# Altium PCB XL991XT10W.PcbDoc (part 2 of 2)
Units mm, origin at the board's own origin, x right, y up, seen from the top; angles counter-clockwise.
Board outline 52.36 x 73.42 mm, 5 copper layers (Top Layer, Mid-Layer 2, Mid-Layer 6, Mid-Layer 13, Bottom Layer); 103 components, 66 nets, 312 pads, 177 vias.
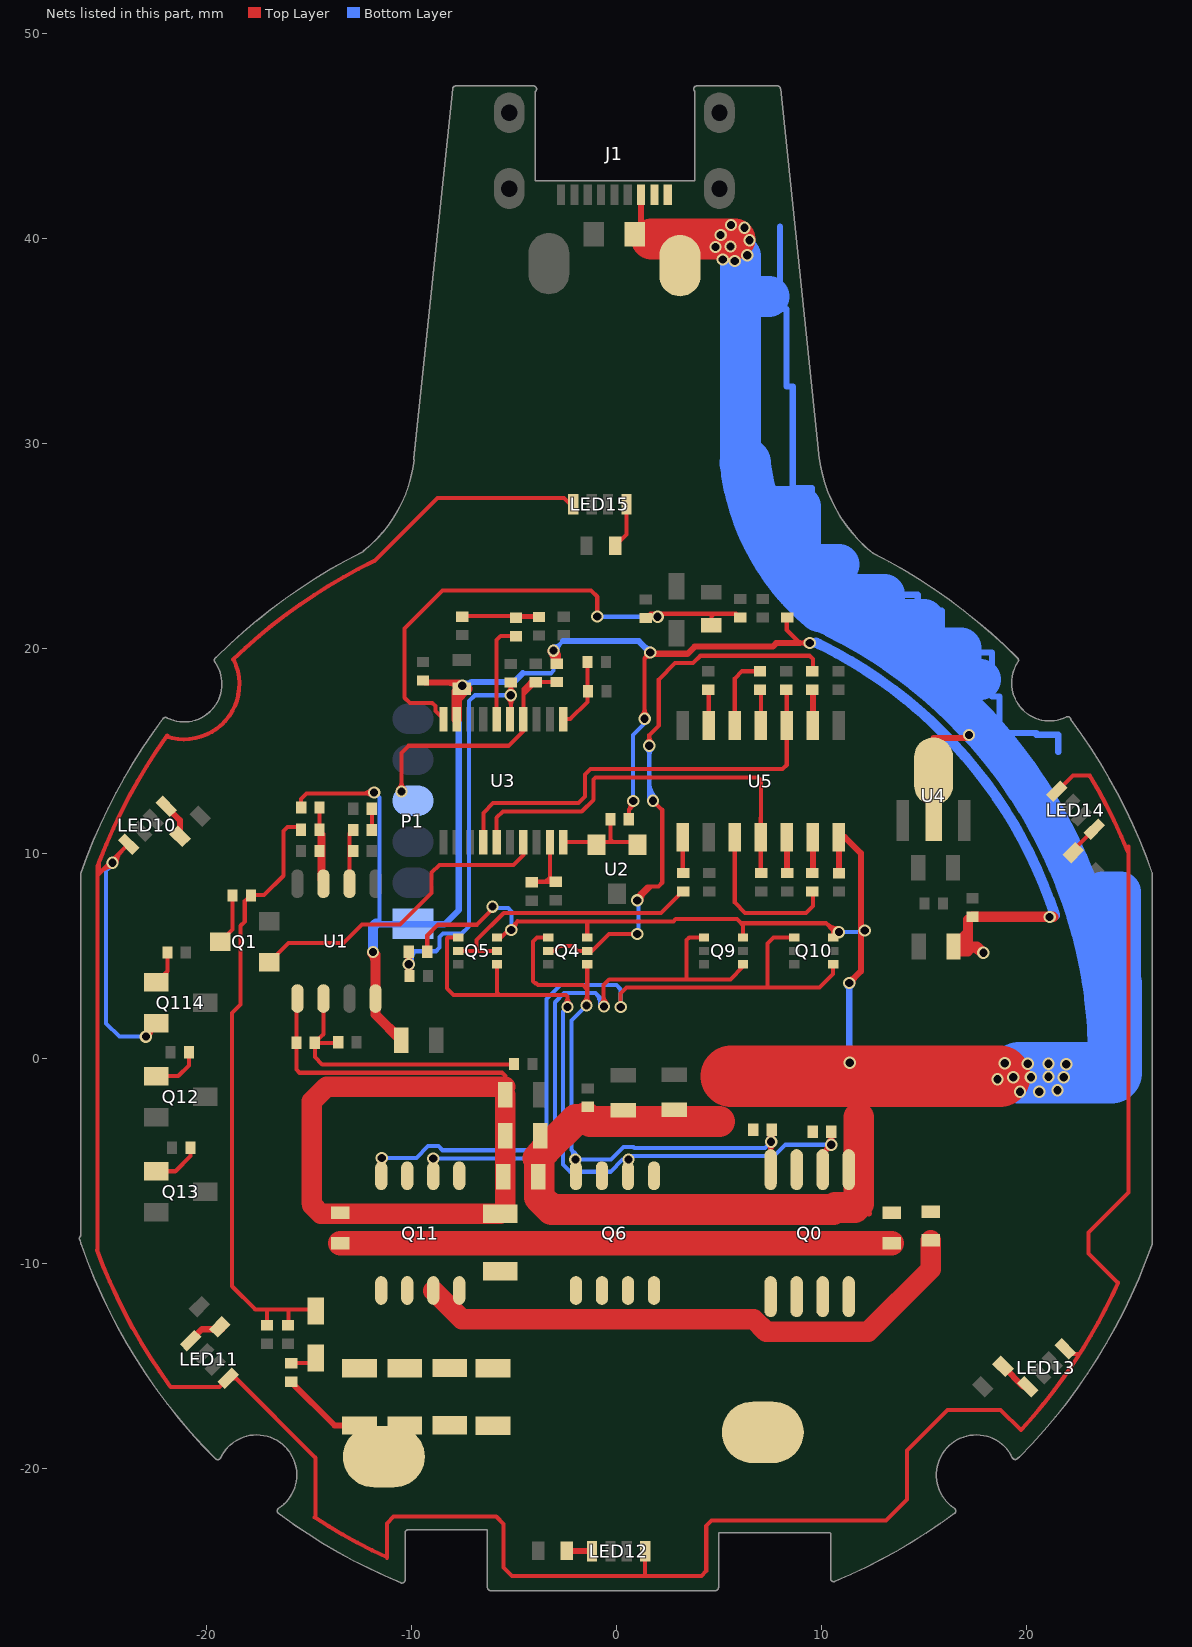
[diagram p3: the nets of this part, all layers, seen from the top]

## Via types
v1: diameter 0.6, hole 0.4, Top Layer to Bottom Layer, 177 vias

## Nets (pads, with @x,y where several pads share a name; then routed paths per layer and width w, separated by ;. In a path a pad name is that pad's centre, name@x,y a point inside that pad or via, vN(x,y) a via of type N, cw(c..) or ccw(c..) an arc to the next point about the centre after c; other vN are vias at no path point) (continued)
IN_VCC_AD: C0.2 R19.1 R25.2 U3.5 | length 24.8
  Top Layer w0.2: v1@-10.276,4.456 cw(c-10.623,4.109) R25.2@-10.132,4.109 ; v1@-10.276,4.739 ccw(c-10.623,5.085) R19.1@-10.132,5.085 ; R25.2@-10.132,4.12 cw(c-9.657,4.12) v1@-9.993,4.456 ; R19.1@-10.132,5.075 ccw(c-9.657,5.075) v1@-9.993,4.739 ; R19.1@-10.132,5.182 -10.132,4.081 R25.2@-10.102,4.05 ; v1@-5.298,17.581 cw(c-5.639,17.24) -5.156,17.24 cw(c-4.673,17.24) v1@-5.015,17.581 ; v1@-5.298,17.864 ccw(c-5.639,18.206) -5.156,18.206 ccw(c-4.673,18.206) v1@-5.015,17.864 ; U3.5@-5.197,16.558 -5.156,16.598 v1(-5.156,17.723) C0.2@-5.156,18.347
  Bottom Layer w0.2: v1@-10.227,4.775 ccw(c-10.307,4.928) -10.135,4.928 ; -10.047,5.016 ccw(c-9.77,4.739) v1(-10.135,4.597) -10.135,4.928 ; v1@-10.042,4.775 cw(c-9.962,4.928) -10.135,4.928 ; v1@-9.948,4.67 cw(c-9.458,4.86) -9.83,5.232 ; v1(-5.156,17.723) -6.909,17.723 -7.198,17.434 -7.198,6.451 -7.549,6.099 -8.469,6.099 -8.631,5.937 -8.631,5.413 -8.812,5.232 -9.83,5.232 ; -10.135,4.928 -9.83,5.232
NA_PWM: R31.1 U3.14 U5.3 | length 21.5
  Top Layer w0.2: U3.14@-6.497,10.558 -6.497,11.982 -6.021,12.458 -1.862,12.458 -1.53,12.789 -1.53,13.856 -1.27,14.116 8.103,14.116 8.306,14.32 U5.3@8.306,16.241 ; R31.1@8.306,17.996 U5.3@8.306,16.241 ; U5.3@8.311,16.246 U5.3@8.306,16.241
NB_PWM: R36.1 U3.15 U5.11 | length 22.5
  Top Layer w0.2: U3.15@-5.847,10.558 -5.847,11.748 -5.537,12.058 -1.696,12.058 -1.13,12.623 -1.13,13.613 -1.028,13.716 6.909,13.716 7.041,13.584 U5.11@7.041,10.796 ; 7.031,11.745 7.031,9.046 7.041,9.056 U5.11@7.041,10.509
NetC2_2: C2.2 R2.1 R3.1 U1.6 | length 14
  Top Layer w0.2: U1.6@-14.298,2.925 -14.298,1.185 C2.2@-14.718,0.766 ; R3.1@-13.585,0.766 C2.2@-14.718,0.766 ; R2.1@-5.002,-0.296 -13.395,-0.296 -14.358,-0.296 -14.718,0.064 C2.2@-14.718,0.766
NetC3_1: C3.1 C4.2 D1.2 R6.2 R15.1 | length 31
  Top Layer w0.2: -17.135,-12.246 -17.054,-12.327 C4.2@-17.054,-13.013 ; R6.2@-16.004,-13.012 -16.004,-12.284 -16.043,-12.246 ; C3.1@-15.388,11.158 C3.1@-15.392,11.154 -15.541,11.303 -16.053,11.303 -16.256,11.1 -16.256,8.916 -17.197,7.975 -17.838,7.975 -18.136,7.678 -18.136,6.68 -18.338,6.478 -18.338,2.642 -18.759,2.222 -18.759,-11.112 -17.625,-12.246 -16.043,-12.246 ; D1.2@-14.467,-12.246 -16.043,-12.246
NetC3_2: C3.2 R7.2 R10.1 U1.3 | length 6.5
  Top Layer w0.2: C3.2@-14.492,11.154 C3.2@-14.485,11.147 ; R7.2@-14.485,12.218 C3.2@-14.485,11.147 ; C3.2@-14.485,11.147 -14.298,10.96 U1.3@-14.298,8.525 -14.485,8.712 C3.2@-14.485,11.147
NetC5_2: C5.2 R8.1 U3.1 | length 3.5
  Top Layer w0.2: U3.1@-2.597,16.558 -2.257,16.558 -1.411,17.404 C5.2@-1.411,19.345
NetC6_2: C6.2 R9.1 | length 1
  Top Layer w0.2: C6.2@-11.942,12.179 -11.938,12.175 R9.1@-11.938,11.175
NetC7_1: C7.1 R13.1 U3.19 | length 3.2
  Top Layer w0.2: R13.1@-4.165,8.597 -4.136,8.626 -3.454,8.626 ; U3.19@-3.247,10.558 -3.247,9.904 -3.247,8.834 -3.454,8.626 ; C7.1@-2.968,8.626 -3.454,8.626
NetC20_2: C20.2 C22.1 C23.2 C24.2 C26.2 C27.2 Q0.C1 Q6.C1 Q11.C2 | length 26.9
  Top Layer w1.2: C26.2@-13.475,-9.021 C22.1@13.425,-9.021
NetD1_1: D1.1 R4.1 | length 1.3
  Top Layer w0.2: R4.1@-15.89,-14.866 -14.925,-14.866 D1.1@-14.671,-14.612
NetLED10_1: LED10.1 R41.2 | length 1.7
  Top Layer w0.3: LED10.1@-21.966,12.298 -21.298,11.63 -21.298,11.392 R41.2@-21.298,10.833
NetLED11_1: LED11.1 R42.2 | length 1.8
  Top Layer w0.3: LED11.1@-20.782,-13.762 -20.228,-13.208 -19.254,-13.208 R42.2@-19.215,-13.17
NetLED12_1: LED12.1 R43.2 | length 1.2
  Top Layer w0.3: R43.2@-2.424,-24.028 -1.224,-24.028 LED12.1@-1.198,-24.054
NetLED13_1: LED13.1 R44.2 | length 1.6
  Top Layer w0.3: R44.2@18.859,-15.024 19.846,-16.011 LED13.1@20.061,-16.011
NetLED14_1: LED14.1 R45.2 | length 1.6
  Top Layer w0.2: R45.2@22.289,10.045 22.289,10.163 LED14.1@23.322,11.197
NetLED15_1: LED15.1 R46.2 | length 2.3
  Top Layer w0.2: R46.2@-0.062,25.019 0.487,25.568 LED15.1@0.487,27.051
NetQ1_C: Q1.C R15.2 | length 2.5
  Top Layer w0.2: Q1.C@-19.336,5.701 -18.738,6.299 R15.2@-18.738,7.975
NetQ9_1: Q9.1 Q9.4 Q11.B1 | length 31
  Top Layer w0.2: v1@-9.081,-5.018 cw(c-9.422,-5.36) -8.94,-5.36 cw(c-8.457,-5.36) v1@-8.798,-5.018 ; Q11.B1@-8.94,-5.721 v1(-8.94,-4.877) ; v1@-0.751,2.681 ccw(c-1.031,2.962) -0.635,2.962 ; -0.635,3.084 ccw(c-0.065,3.084) v1@-0.468,2.681 ; v1(-0.61,2.54) -0.635,2.565 -0.635,3.581 -0.356,3.861 3.429,3.861 ; Q9.1@4.273,5.901 3.551,5.901 3.425,5.776 3.425,3.864 3.429,3.861 ; Q9.4@6.173,4.601 6.173,4.48 5.554,3.861 3.429,3.861
  Bottom Layer w0.2: v1(-8.94,-4.877) -3.235,-4.877 -3.007,-4.648 -3.007,2.744 -2.56,3.191 -1.021,3.191 ; v1@-0.808,2.566 ccw(c-1.549,2.662) -1.021,3.191 ; -0.733,2.903 cw(c-1.041,2.596) v1(-0.61,2.54) -0.61,2.78 -1.021,3.191
NetQ10_1: Q10.1 Q10.4 Q11.B2 | length 37.6
  Top Layer w0.2: v1@-11.597,-4.993 cw(c-11.88,-5.276) Q11.B2@-11.48,-5.276 ; Q11.B2@-11.48,-5.721 -11.48,-4.851 v1(-11.455,-4.851) ; Q11.B2@-11.48,-5.393 cw(c-10.914,-5.393) v1@-11.314,-4.993 ; v1(0.203,2.515) 0.203,3.175 0.489,3.461 7.366,3.461 ; Q10.1@8.673,5.901 7.656,5.901 7.366,5.611 7.366,3.461 ; Q10.4@10.573,4.601 10.573,4.122 9.912,3.461 7.366,3.461
  Bottom Layer w0.2: v1(-11.455,-4.851) -9.763,-4.851 -9.188,-4.277 -8.691,-4.277 -8.491,-4.477 -3.556,-4.477 -3.407,-4.328 -3.407,2.91 -2.726,3.591 -0.009,3.591 0.203,3.378 v1(0.203,2.515)
NetQ12_B: Q12.B R40.1 | length 2.5
  Top Layer w0.2: Q12.B@-22.46,-0.86 -21.383,-0.86 -20.861,-0.337 R40.1@-20.861,0.299
NetQ13_B: Q13.B R39.1 | length 2.4
  Top Layer w0.2: Q13.B@-22.46,-5.502 -21.53,-5.502 -20.784,-4.757 R39.1@-20.784,-4.324
NetQ114_B: Q114.B R38.1 | length 1.7
  Top Layer w0.2: Q114.B@-22.46,3.712 -21.913,4.259 R38.1@-21.913,5.151
NetR5_2: R5.2 U2.2 U2.3 U3.20 | length 4.9
  Top Layer w0.2: U3.20@-2.597,10.558 -0.333,10.558 ; R5.2@-0.298,11.703 -0.298,10.68 -0.254,10.636 -0.333,10.558 ; U2.2@1.025,10.439 0.907,10.558 -0.333,10.558
NetR9_2: R9.2 R11.2 U1.2 | length 2.7
  Top Layer w0.2: U1.2@-13.028,8.525 -13.028,10.985 R9.2@-12.838,11.175
NetR14_1: R14.1 R16.2 RTC1.2 | length 5
  Top Layer w0.2: RTC1.2@-7.493,21.593 -3.815,21.593 -3.76,21.537 -4.898,21.537 -4.927,21.508 R14.1@-4.944,21.526
NetR29_1: R29.1 U5.2 | length 1.7
  Top Layer w0.3: U5.2@9.581,16.246 R29.1@9.581,17.996
NetR30_1: R30.1 U5.4 | length 1.8
  Top Layer w0.2: R30.1@7.031,17.996 7.041,17.986 U5.4@7.041,16.246
NetR30_2: R30.2 U5.5 | length 3.7
  Top Layer w0.2: U5.5@5.771,16.246 5.771,18.541 6.127,18.896 R30.2@7.031,18.896
NetR32_1: R32.1 U5.6 | length 1.8
  Top Layer w0.2: U5.6@4.501,16.246 4.501,17.991 R32.1@4.506,17.996
NetR34_1: R34.1 U5.8 | length 1.7
  Top Layer w0.2: R34.1@3.231,9.046 U5.8@3.231,10.796
NetR35_1: R35.1 U5.10 | length 8.1
  Top Layer w0.2: U5.10@5.771,10.796 5.771,7.608 6.278,7.101 9.241,7.101 9.581,7.441 R35.1@9.581,8.146
NetR35_2: R35.2 U5.13 | length 1.7
  Top Layer w0.3: R35.2@9.581,9.046 U5.13@9.581,10.796
NetR37_1: R37.1 U5.12 | length 1.8
  Top Layer w0.3: R37.1@8.306,9.046 8.311,9.051 U5.12@8.311,10.796
NRST: C8.1 P1.4 R12.2 U3.4 | length 13.7
  Top Layer w0.2: v1@-10.632,13.165 ccw(c-10.973,13.507) -10.49,13.507 ccw(c-10.007,13.507) v1@-10.349,13.165 ; v1(-10.49,13.024) -10.49,14.907 -10.14,15.258 -5.273,15.258 -4.547,15.983 U3.4@-4.547,16.558 -4.547,17.755 ; C8.1@-3.941,18.361 -4.547,17.755 ; R12.2@-2.896,18.365 -4.215,18.365 -4.227,18.353 -4.547,18.033 -4.547,17.755
QC20: D2.1 R20.1 R21.2 U3.10 | length 25.5
  Top Layer w0.2: U3.10@-8.447,16.558 -8.839,16.95 -8.839,17.196 -8.992,17.348 -10.084,17.348 -10.338,17.602 -10.338,20.98 -8.482,22.837 -1.244,22.837 -0.94,22.532 v1(-0.94,21.565) ; R20.1@1.457,21.492 1.667,21.702 v1@2.007,21.702 ; v1(2.007,21.555) v1@2.007,21.702 ; D2.1@4.632,21.143 4.632,21.559 4.775,21.702 ; R21.2@6.007,21.523 5.828,21.702 4.775,21.702 ; v1@2.007,21.702 4.775,21.702
  Bottom Layer w0.2: v1(-0.94,21.565) -0.93,21.555 v1(2.007,21.555)
R: LED10.4 LED11.4 LED12.4 LED13.4 LED14.4 LED15.4 Q114.E | length 177.8
  Top Layer w0.2: -25.347,-9.337 ccw(c0.004,-0.047) -21.814,-15.952 -21.748,-16.018 -20.42,-16.018 ; -25.324,-9.286 -25.324,8.966 ; -25.324,9.398 -25.324,9.357 ; -25.145,9.119 cw(c-24.587,8.561) v1@-24.587,9.35 ; v1@-24.387,9.55 cw(c-23.598,9.55) -24.156,10.109 ; LED10.4@-23.805,10.46 -25.298,8.966 -25.324,8.966 ; v1(-22.962,1.067) -22.46,1.569 Q114.E@-22.46,1.712 ; Q114.E@-22.962,1.267 ccw(c-22.962,1.75) -22.62,1.408 ccw(c-22.279,1.067) v1@-22.762,1.067 ; -21.92,15.762 ccw(c0.004,0.003) -21.957,15.71 ; -19.856,-16.018 -20.42,-16.018 ; -18.704,19.471 cw(c0.004,0.003) -11.831,24.271 ; -18.664,19.429 cw(c-21.103,18.271) -21.957,15.71 ; -14.721,-22.389 ccw(c0.004,0.003) -11.203,-24.341 ; -14.681,-22.403 -14.681,-19.482 -18.563,-15.6 LED11.4@-18.944,-15.6 -19.361,-16.018 -20.42,-16.018 ; -11.811,24.282 -8.737,27.357 -2.563,27.357 -2.257,27.051 LED15.4@-2.113,27.051 ; -11.201,-24.359 -11.201,-22.682 -10.871,-22.352 -5.867,-22.352 -5.512,-22.708 -5.512,-24.841 -5.105,-25.248 1.397,-25.248 ; LED12.4@1.397,-24.255 1.397,-25.248 ; 19.733,-18.133 18.745,-17.145 16.154,-17.145 14.173,-19.126 14.173,-21.514 13.146,-22.541 4.641,-22.541 4.377,-22.805 4.377,-25.01 4.14,-25.248 1.397,-25.248 ; LED14.4@21.484,13.035 22.266,13.818 23.022,13.818 23.064,13.775 ; LED13.4@21.9,-14.172 22.147,-14.42 22.487,-14.42 ; 23.099,13.796 cw(c0.004,0.003) 24.953,10.062 ; 24.991,10.353 24.991,-6.53 23.038,-8.484 23.038,-9.516 24.443,-10.921 24.477,-10.921 cw(c0.004,0.003) 22.77,-14.137 ; -25.324,8.966 -25.324,9.051 ; -25.324,9.051 -25.324,9.357 ; -25.324,9.051 -25.263,9.112 -25.263,9.519 ; -25.324,9.357 cw(c0.004,0.003) -25.263,9.519 ; -25.263,9.519 cw(c0.004,0.003) -25.219,9.637 cw(c0.004,0.003) -21.957,15.71 ; 22.77,-14.137 cw(c0.004,0.003) 19.768,-18.097 ccw(c0.004,0.003) 22.77,-14.137
  Bottom Layer w0.2: -24.81,9.258 cw(c-24.587,9.035) v1@-24.587,9.35 ; v1@-24.785,9.519 cw(c-25.186,9.456) -24.899,9.169 ; v1(-24.587,9.55) -24.587,9.481 -24.899,9.169 ; v1(-22.962,1.067) -24.257,1.067 -24.899,1.709 -24.899,9.169
RUN_POWER: R14.2 U3.6 | length 4.9
  Top Layer w0.2: U3.6@-5.847,16.558 -5.847,20.41 -5.649,20.608 R14.2@-4.927,20.608
SIGN: C20.1 C23.1 C24.1 C27.1 pad.0@-11.351,-19.431 R4.2 | length 4.2
  Top Layer w0.3: R4.2@-15.89,-15.766 -13.749,-17.907 C20.1@-12.533,-17.907
SWITCH: Q1.B U3.17 | length 15.8
  Top Layer w0.2: Q1.B@-16.936,4.701 -16.936,4.705 -15.996,5.645 -13.31,5.645 -12.408,6.547 -10.555,6.547 -9.017,8.085 -9.017,9.068 -8.642,9.442 -5.029,9.442 -4.547,9.925 U3.17@-4.547,10.558
TX_GND: C2.1 C18.2 C19.2 C25.1 C26.1 Q11.E1 Q11.E2 R1.2 U1.5 | length 44.8
  Top Layer w0.2: U1.5@-15.568,2.925 -15.618,2.876 C2.1@-15.618,0.766 -15.621,0.762 -15.621,-0.533 -15.459,-0.696 -5.588,-0.696 -5.425,-0.859 R1.2@-5.425,-1.771
  Top Layer w1: R1.2@-5.436,-1.372 -14.148,-1.372 -14.859,-2.083 -14.859,-7.036 -14.834,-7.061 -14.834,-7.163 -14.426,-7.571 C25.1@-5.675,-7.571 -5.425,-7.321 C18.2@-5.425,-3.771 R1.2@-5.425,-1.771 R1.2@-5.432,-1.778
TX_VCC: C11.1 C12.1 C13.1 C18.1 C19.1 C21.2 C22.2 C28.2 C29.1 J1.1 pad.2@3.099,38.684 Q0.E1 Q0.E2 Q4.6 Q5.6 Q6.E1 Q6.E2 Q9.6 Q10.6 R19.2 R26.1 R27.2 U4.Vin U5.14 | length 231.9
  Top Layer w0.2: R19.2@-9.232,5.182 -9.232,6 -8.705,6.528 -6.807,6.528 -6.045,7.29 v1(-6.045,7.41) ; Q5.6@-5.827,5.901 -5.626,5.901 -4.838,6.69 ; v1@-4.937,6.319 cw(c-4.565,6.418) -4.838,6.69 ; -4.826,6.701 -4.838,6.69 ; Q4.6@-1.427,5.901 -1.427,6.68 ; Q9.6@6.173,5.901 6.173,6.501 6.073,6.601 ; 10.54,6.285 ccw(c10.829,6.574) v1(10.851,6.166) Q10.6@10.587,5.901 ; v1@10.655,6.127 cw(c10.41,6.078) Q10.6@10.587,5.901 ; Q10.6@10.812,5.97 ccw(c10.763,5.725) Q10.6@10.587,5.901 ; v1@10.84,6.365 cw(c10.796,7.174) 10.223,6.601 ; -4.838,6.69 1.511,6.69 2.778,6.69 2.889,6.801 5.873,6.801 6.073,6.601 ; 6.073,6.601 10.223,6.601 ; 10.223,6.601 10.573,6.251 Q10.6@10.573,5.901 Q10.6@10.587,5.901
  Top Layer w0.3: J1.1@1.198,42.145 1.198,40.589 1.524,40.589 ; 5.073,-0.349 5.588,-0.864 ; C28.2@10.852,9.042 U5.14@10.851,10.796 ; v1(11.354,3.683) 11.923,4.252 11.923,10.016 U5.14@11.144,10.795 ; v1@11.354,3.833 ccw(c11.354,4.195) 11.61,3.939 ccw(c11.866,3.683) v1@11.504,3.683 ; 11.825,-7.071 12.325,-7.571 ; U4.Vin@15.471,14.016 15.471,15.646 v1@17.196,15.646 ; U5.14@10.851,10.796 U5.14@11.144,10.795 ; U5.14@10.851,10.796 U5.14@10.851,10.796 11.143,10.796 U5.14@11.144,10.795
  Top Layer w1.5: -3.825,-4.871 -3.475,-4.471 -1.975,-2.971 ; -3.775,-4.971 -3.775,-6.771 -3.175,-7.371 10.578,-7.371 10.678,-7.271 11.625,-7.271 11.825,-7.071 11.825,-2.871 ; -1.475,-2.871 -1.275,-3.071 5.025,-3.071
  Top Layer w2: 1.702,39.98 5.791,39.98
  Top Layer w3: 5.588,-0.864 v1@18.694,-0.864
  Bottom Layer w0.2: v1@-6.198,7.334 -5.283,7.334 -5.131,7.182 v1(-5.131,6.267) ; v1(10.851,6.166) 12.04,6.166 v1(12.116,6.242)
  Bottom Layer w0.3: 7.971,40.589 7.971,36.576 8.288,36.576 8.288,32.791 8.604,32.791 8.604,27.824 9.54,27.824 9.54,25.578 ; v1@11.248,3.577 cw(c10.992,3.321) 11.354,3.321 cw(c11.716,3.321) v1@11.46,3.577 ; v1(11.354,3.683) 11.354,-0.178 v1(11.379,-0.203) ; 13.493,22.628 14.697,22.628 14.697,21.843 15.872,21.843 15.872,20.531 17.323,20.531 17.323,19.811 18.315,19.811 18.315,17.669 18.696,17.669 18.696,15.875 20.479,15.875 20.479,15.8 21.556,15.8 21.556,14.955 ; v1@20.979,-0.78 cw(c21.398,-1.223) 21.415,-0.613 ; v1@21.185,-0.998 cw(c22.103,-1.966) 22.139,-0.632 ; 21.285,-0.61 24.13,-0.686 21.59,-0.686 ; v1@21.318,-0.927 cw(c21.461,-1.196) v1@21.701,-1.007 ; v1@21.703,-0.819 cw(c22.081,-1.13) 22.034,-0.643 ; v1@21.84,-0.385 ccw(c22.565,0.34) 22.565,-0.686 ; v1@21.925,-1.02 cw(c22.733,-1.828) 22.733,-0.686 ; v1@22.052,-0.173 ccw(c23.289,1.064) 23.289,-0.686 ; v1@20.973,-0.357 ccw(c21.578,0.216) 21.555,-0.617 cw(c21.578,0.216) v1@20.973,-0.357 ; v1@21.191,-0.151 ccw(c22.321,0.92) 22.279,-0.636 cw(c22.321,0.92) v1@21.191,-0.151 ; 21.488,-0.615 cw(c21.471,-1.244) 21.927,-0.811 ccw(c21.471,-1.244) 21.488,-0.615 ; v1@21.837,-0.383 ccw(c22.436,0.185) 22.414,-0.64 cw(c22.436,0.185) v1@21.837,-0.383 ; v1@22.054,-0.176 ccw(c23.179,0.89) 23.138,-0.659 cw(c23.179,0.89) v1@22.054,-0.176
  Bottom Layer w2: 6.045,28.908 6.045,39.167 ; 6.489,37.181 7.438,37.181 ; 7.438,26.922 8.973,26.922 8.973,24.098 10.86,24.098 ; 9.887,21.874 cw(c0.004,0.003) 24,0.478 ; 10.86,22.65 13.079,22.65 13.079,21.424 15.003,21.424 15.003,20.035 16.813,20.035 16.813,18.494 17.765,18.494 ; 21.59,-0.686 24.651,-0.686 24.651,3.683 24.587,3.683 24.587,8.128 23.749,8.128
  Bottom Layer w2.5: 6.281,29.059 ccw(c17.015,30.253) 10.017,22.027
  Bottom Layer w3: 19.66,-0.686 24.13,-0.686
  other v1: 19.685,-1.626 20.625,-1.626 21.514,-1.549 18.593,-1.016 19.355,-0.914 20.218,-0.914 21.819,-0.914 21.082,-0.889 21.946,-0.279 20.066,-0.254 21.082,-0.254 18.948,-0.229 17.196,15.788 5.771,38.913 5.182,38.989 6.375,39.192 4.826,39.599 5.563,39.624 6.489,39.929 5.08,40.183 6.248,40.538 5.588,40.665
UA: Q0.B2 Q4.1 Q4.4 Q6.B2 R26.2 | length 30.4
  Top Layer w0.2: Q4.1@-3.327,5.901 -3.878,5.901 -4.064,5.715 -4.064,3.767 -3.955,3.658 -3.955,3.669 -3.941,3.683 -3.839,3.581 -1.633,3.581 -1.427,3.375 ; v1@-1.603,2.732 ccw(c-2.03,3.159) -1.427,3.159 ; v1(-1.462,2.591) -1.427,2.626 -1.427,3.375 ; -1.427,2.989 ccw(c-1.064,2.989) v1@-1.321,2.732 ; Q4.4@-1.427,4.601 -1.427,3.375 ; v1@7.402,-4.205 cw(c7.117,-4.49) Q0.B2@7.52,-4.49 ; v1@7.402,-3.923 ccw(c7.117,-3.638) R26.2@7.52,-3.638 ; Q0.B2@7.52,-5.421 7.52,-3.496 R26.2@7.575,-3.496 ; Q0.B2@7.52,-4.603 cw(c8.083,-4.603) v1@7.685,-4.205 ; R26.2@7.52,-3.525 ccw(c8.083,-3.525) v1@7.685,-3.923
  Bottom Layer w0.2: v1@-2.166,-4.807 ccw(c-2.377,-4.649) -2.191,-4.462 ; -2.028,-4.625 cw(c-2.191,-4.789) v1(-2.007,-4.928) ; v1(-1.462,2.591) -2.191,1.862 -2.191,-4.462 ; v1(7.544,-4.064) 7.244,-4.364 0.869,-4.364 0.833,-4.328 0.336,-4.328 -0.264,-4.928 v1(-2.007,-4.928) ; -2.191,-4.462 -2.007,-4.646 v1(-2.007,-4.928)
UAB: Q0.B1 Q5.1 Q5.4 Q6.B1 R27.1 | length 37
  Top Layer w0.2: Q5.1@-7.727,5.901 -8.233,5.901 -8.277,5.857 -8.277,3.425 -7.95,3.099 -5.701,3.099 ; Q5.4@-5.827,4.601 -5.827,3.225 -5.701,3.099 ; v1@-2.529,2.656 ccw(c-2.87,2.997) -2.388,2.997 ccw(c-1.905,2.997) v1@-2.246,2.656 ; v1(-2.388,2.515) -2.388,3.023 -2.464,3.099 -5.701,3.099 ; Q0.B1@10.06,-5.421 10.06,-4.621 v1(10.475,-4.206) R27.1@10.475,-3.546 ; v1@10.275,-4.206 cw(c9.793,-4.206) 10.134,-4.547 cw(c10.475,-4.889) v1@10.475,-4.406 ; v1@10.334,-4.064 ccw(c9.993,-3.723) 10.475,-3.723 ccw(c10.958,-3.723) v1@10.617,-4.064
  Bottom Layer w0.2: v1(-2.388,2.515) -2.607,2.296 -2.607,-5.176 -2.255,-5.528 -0.299,-5.528 0.301,-4.928 v1(0.584,-4.928) 0.748,-4.764 7.693,-4.764 8.251,-4.206 v1(10.475,-4.206)
UP-A: Q4.2 Q4.5 R29.2 | length 34.6
  Top Layer w0.2: Q4.2@-3.327,5.251 -3.028,5.251 -2.8,5.48 -2.124,5.48 -1.896,5.251 Q4.5@-1.427,5.251 -1.194,5.251 -0.37,6.075 v1(1.016,6.075) ; 1.159,8.061 ccw(c1.503,7.717) v1(1.016,7.715) ; v1@1.216,7.716 cw(c2.181,7.719) 1.499,8.401 ; 1.331,8.046 cw(c1.016,8.361) 1.016,7.915 ccw(c1.016,8.398) 1.357,8.057 ccw(c1.699,7.715) 1.216,7.715 cw(c1.736,7.715) 1.368,8.083 ; v1@1.459,15.4 ccw(c1.117,15.742) 1.6,15.742 ccw(c2.083,15.742) v1@1.742,15.4 ; v1(1.6,15.259) 1.6,15.778 2.064,16.241 2.064,18.498 2.862,19.296 3.734,19.296 4.089,19.651 9.425,19.651 9.581,19.495 R29.2@9.581,18.896 ; v1(1.778,12.576) 1.79,12.576 2.231,12.135 2.231,8.575 2.057,8.401 1.702,8.401 v1(1.016,7.715) ; v1(1.016,7.715) v1@1.016,7.731 ; v1@1.016,7.731 1.016,7.918 1.499,8.401 ; v1@1.016,7.731 1.686,8.401 1.499,8.401
  Bottom Layer w0.2: v1(1.016,7.715) 1.073,7.658 v1@1.073,6.075 ; v1@1.459,15.118 cw(c1.117,14.776) 1.6,14.776 cw(c2.083,14.776) v1@1.742,15.118 ; v1@1.6,12.576 v1(1.6,15.259) ; 1.6,13.005 ccw(c2.207,13.005) v1(1.778,12.576) ; 1.6,13.488 ccw(c2.69,13.488) v1@1.919,12.717
UP-B: Q5.2 Q5.5 R34.2 | length 13.5
  Top Layer w0.2: Q5.2@-7.727,5.251 -6.827,5.251 ; Q5.5@-5.827,5.251 -6.827,5.251 ; R34.2@3.23,8.146 2.174,7.09 1.676,7.09 1.665,7.101 -5.501,7.101 -6.827,5.776 -6.827,5.251
VCC: C1.2 C10.2 C15.2 C17.2 P1.1 R5.1 R7.1 R12.1 R22.2 R50.2 U1.8 U3.9 | length 107.6
  Top Layer w0.2: R7.1@-15.385,12.218 -15.385,12.669 -15.126,12.929 -11.877,12.929 v1(-11.826,12.979) ; -12.431,12.929 ccw(c-12.431,13.584) v1@-11.968,13.121 ; -12.187,12.929 cw(c-12.187,12.619) v1@-11.968,12.838 ; v1(-3.072,19.901) -3.072,19.724 v1@-3.027,19.679 ; R5.1@0.602,11.703 0.602,12.128 ; v1@0.642,12.462 cw(c0.41,12.32) 0.602,12.128 ; v1(0.813,12.567) 0.838,12.541 0.838,12.363 0.602,12.128 ; v1@1.23,16.721 ccw(c0.889,17.063) 1.372,17.063 ccw(c1.854,17.063) v1@1.513,16.721 ; v1(1.372,16.58) 1.372,19.526 ; v1@1.453,19.775 cw(c1.166,19.731) 1.372,19.526 ; v1@1.621,19.608 ccw(c1.577,19.321) 1.372,19.526 ; v1(1.651,19.806) 1.372,19.526 ; R22.2@8.307,21.523 8.307,20.903 8.941,20.269 v1(9.425,20.269) ; v1@9.284,20.128 ccw(c8.942,19.786) 8.942,20.269 ccw(c8.942,20.752) v1@9.284,20.411 ; C15.2@16.446,5.462 16.457,5.452 16.631,5.278 C15.2@16.631,5.216
  Top Layer w0.3: C10.2@-9.445,18.445 -9.339,18.339 -7.677,18.339 v1(-7.522,18.184) ; -8.258,18.339 cw(c-8.258,17.448) C1.2@-7.629,18.078 ; v1(1.651,19.806) 1.704,19.752 3.472,19.752 3.821,20.101 7.63,20.101 7.798,20.269 8.941,20.269
  Top Layer w0.5: v1@-11.92,5.158 cw(c-12.311,4.768) -11.758,4.768 ; v1@-11.758,5.067 U1.8@-11.758,2.925 -11.758,2.145 C17.2@-10.502,0.889 ; U3.9@-7.797,16.558 -7.797,17.561 ; -7.797,17.504 cw(c-6.971,17.504) C1.2@-7.491,18.145 ; C1.2@-7.797,17.796 cw(c-7.453,17.796) C1.2@-7.514,18.135 ; C1.2@-7.572,18.18 cw(c-8.346,18.111) -7.797,17.561 ; C1.2@-7.264,18.039 C1.2@-7.319,18.039 ; v1@-3.107,19.866 cw(c-3.496,19.477) R12.1@-2.946,19.477 ; v1@-3.1,19.86 cw(c-3.291,19.573) -2.946,19.573 ; v1@-3.027,19.679 -2.946,19.598 ; v1@-3.024,19.888 ccw(c-2.734,19.81) -2.946,19.598 ; R12.1@-2.946,19.265 -2.946,19.598 ; C15.2@16.446,5.462 C15.2@16.467,5.462 ; C15.2@16.457,5.452 C15.2@16.467,5.462 ; C15.2@16.631,5.216 17.146,5.216 17.146,5.462 ; R50.2@17.146,6.766 17.146,6.141 ; R50.2@17.346,6.916 21.296,6.916 21.311,6.901 21.14,6.901 v1(21.133,6.909) ; v1@17.862,5.125 ccw(c17.146,4.534) 17.146,5.462 ; v1(17.901,5.156) 17.595,5.462 17.146,5.462 ; -7.797,17.561 C1.2@-7.319,18.039 ; -7.797,17.561 -7.797,17.91 v1(-7.522,18.184) -7.377,18.039 C1.2@-7.319,18.039 ; C15.2@16.467,5.462 17.146,5.462 ; C15.2@16.467,5.462 17.146,6.141 ; 17.146,5.462 17.146,6.141
  Bottom Layer w0.2: v1(-11.826,12.979) -11.573,12.726 -11.573,6.741 -11.737,6.576 ; -11.506,6.576 P1.1@-9.931,6.576 ; -4.572,18.796 -3.2,18.796 -3.072,18.925 v1(-3.072,19.901) -2.609,20.364 ; v1@-3.072,20.101 ccw(c-3.072,20.584) -2.73,20.243 ccw(c-2.389,19.901) v1@-2.872,19.901 ; v1(0.813,12.567) 0.813,15.792 1.397,16.377 1.397,16.554 v1(1.372,16.58) ; v1(9.425,20.269) 9.779,20.269 ; v1@9.568,20.129 cw(c9.9,19.805) 9.9,20.269 ; v1@9.568,20.409 ccw(c9.9,20.733) 9.9,20.269 ; 10.029,20.14 10.016,20.153 9.9,20.269 ; 9.779,20.269 cw(c9.779,20.483) 9.596,20.372 ccw(c9.779,20.483) 9.779,20.269 ; 9.779,20.269 ccw(c9.779,20.056) 9.596,20.166 cw(c9.779,20.056) 9.779,20.269 ; 9.779,20.269 9.9,20.269
  Bottom Layer w0.3: -11.506,6.547 -8.658,6.547 -8.656,6.549 -8.386,6.549 -7.696,7.239 -7.696,17.755 ; v1@-7.652,18.108 cw(c-7.902,17.96) -7.696,17.755 ; v1@-7.452,18.317 ccw(c-7.303,18.598) -7.078,18.373 ; -4.572,18.796 -4.995,18.373 -7.078,18.373 ; -2.609,20.364 1.092,20.364 v1(1.651,19.806) ; v1@1.501,19.806 ccw(c1.139,19.806) 1.395,20.062 ccw(c1.651,20.318) v1@1.651,19.956 ; -7.696,17.755 -7.078,18.373
  Bottom Layer w0.5: v1(-11.885,5.194) -11.885,6.429 -11.737,6.576 ; 9.738,20.289 cw(c0.004,0.003) 9.779,20.269 cw(c0.004,0.003) 10.016,20.153 cw(c0.004,0.003) v1@21.391,6.993
VSW: C21.1 C25.2 pad.0@7.139,-18.237 Q0.C2 Q6.C2 Q11.C1 | length 27.8
  Top Layer w1: Q11.C1@-8.94,-11.321 -7.54,-12.721 6.696,-12.721 7.296,-13.321 12.283,-13.321 15.325,-10.278 C21.1@15.325,-8.871
copper on no net: | length 0.2
  Mid-Layer 13 w0.05: -399.615,-17.981 ccw(c-399.59,-17.981) -399.565,-17.981 ccw(c-399.59,-17.981) -399.615,-17.981

## Polygon pours and split planes (outlines as drawn)
GND on Top Layer "Top Layer-No Net" (solid, remove dead copper, pour order 18): 5.131,46.431 5.131,47.278 5.156,47.303 7.823,47.303 8.103,45.314 8.975,36.601 9.677,29.439 10.058,27.813 10.871,26.162 12.421,24.486 15.392,22.86 18.136,20.726 19.482,19.329 19.152,18.593 19.152,17.628 19.583,16.916 20.625,16.383 21.971,16.408 23.546,14.148 25.095,11.278 25.984,9.093 25.908,-9.246 24.359,-12.792 20.243,-18.669 19.533,-19.329 18.567,-18.364 16.993,-18.263 15.977,-18.93 15.471,-20.066 15.621,-21.158 16.332,-22.022 13.843,-23.774 10.668,-25.375 10.568,-23.063 4.801,-23.012 4.775,-25.756 -6.223,-25.756 -6.145,-22.885 -10.262,-22.809 -10.466,-23.241 -10.439,-25.425 -14.63,-23.317 -16.358,-22.098 -15.501,-21.184 -15.501,-19.914 -15.85,-18.948 -17.018,-18.313 -18.39,-18.39 -19.482,-19.253 -23.52,-14.376 -26.035,-8.839 -25.908,9.042 -24.028,13.411 -21.946,16.504 -20.498,16.332 -19.482,16.967 -19.126,18.059 -19.279,19.296 -19.304,19.558 -12.116,24.689 -10.185,27.127 -9.677,29.108 -7.797,47.346 -4.061,47.291 -4.064,42.647 3.886,42.748 3.937,47.303 5.131,47.371
TX_VCC on Top Layer "Top Layer-No Net" (solid, remove dead copper, pour order 15): 0.914,40.538 1.016,40.538 1.499,41.021 1.524,41.046 4.216,41.046 6.452,41.046 6.858,40.64 6.833,40.615 6.807,40.615 6.833,40.615 6.858,40.64 6.858,38.786 6.604,38.532 6.528,38.532 1.753,38.532 0.991,39.294
SIGN on Top Layer "Top Layer-No Net" (solid, remove dead copper, pour order 14): -15.89,-15.766 -14.046,-15.766 -14.003,-15.766 -13.894,-15.875 -13.843,-15.926 -13.843,-16.612 -13.843,-16.689 -13.717,-16.815 -5.119,-16.815 -4.833,-17.1 -4.833,-20.948 -4.801,-20.98 -12.802,-20.98 -13.729,-20.98 -13.881,-20.828 -13.881,-18.93 -13.963,-18.93 -16.154,-16.739 -16.141,-16.726 -16.141,-15.818
NetC20_2 on Top Layer "Top Layer-No Net" (solid, remove dead copper, pour order 13): 13.425,-9.021 13.48,-8.966 14.665,-8.966 14.665,-9.973 14.691,-9.998 11.938,-12.751 9.525,-12.751 9.347,-12.573 9.271,-12.497 9.271,-10.566 4.648,-10.566 4.47,-10.744 4.394,-10.82 4.394,-11.836 4.127,-12.103 4.088,-12.064 -0.102,-12.064 -0.102,-10.719 -0.127,-10.693 -0.229,-10.592 -3.353,-10.592 -4.013,-9.931 -6.706,-9.931 -6.706,-10.236 -7.061,-10.592 -9.416,-10.592 -9.5,-10.676 -9.5,-13.678 -9.256,-13.921 -4.827,-13.921 -4.79,-13.957 -4.79,-16.156 -5.135,-16.5 -13.37,-16.5 -13.487,-16.383 -13.487,-14.156 -13.487,-11.506 -13.614,-11.379 -14.478,-10.516 -14.478,-9.144 -14.478,-8.814 -14.046,-8.382 -13.878,-8.214 -7.807,-8.214 -7.62,-8.026 -7.433,-8.214 -4.457,-8.214 13.739,-8.214 13.907,-8.382 13.919,-8.394 13.919,-8.865
VSW on Top Layer "Top Layer-No Net" (solid, remove dead copper, pour order 12): -9.017,-11.659 -9.263,-11.659 -9.416,-11.506 -9.474,-11.448 -9.474,-10.846 -9.474,-10.65 -9.416,-10.592 -7.061,-10.592 -6.807,-10.338 -6.807,-10.211 -6.807,-10.033 -6.706,-9.931 -4.013,-9.931 -3.607,-10.338 -3.353,-10.592 -2.743,-10.592 -0.229,-10.592 -0.127,-10.693 -0.102,-10.719 -0.102,-10.871 -0.102,-12.064 -0.062,-12.103 4.127,-12.103 4.394,-11.836 4.47,-11.76 4.47,-11.506 4.47,-10.744 4.648,-10.566 9.271,-10.566 9.373,-10.668 9.347,-10.693 9.347,-10.921 9.347,-12.573 9.5,-12.725 9.525,-12.751 11.938,-12.751 12.395,-12.294 14.691,-9.998 14.691,-8.966 14.691,-8.728 14.834,-8.585 14.859,-8.56 14.935,-8.56 16.231,-8.56 16.358,-8.687 16.358,-8.712 16.358,-11.201 15.57,-11.989 13.208,-14.351 10.998,-14.351 10.885,-14.351 10.809,-14.427 10.363,-14.873 10.363,-17.272 10.414,-17.323 10.363,-17.272 10.363,-14.859 10.363,-20.117 10.109,-20.371 2.927,-20.371 2.87,-20.314 2.87,-13.921 -4.115,-13.921 -9.256,-13.921 -9.461,-13.716 -9.5,-13.678 -9.5,-11.43 -9.423,-11.43 -9.373,-11.379
TX_VCC on Top Layer "Top Layer-No Net" (solid, remove dead copper, pour order 11): 2.819,-2.501 3.161,-2.159 3.632,-2.159 3.759,-2.159 3.988,-1.93 3.988,-1.88 3.988,0.406 4.242,0.66 22.187,0.66 22.289,0.559 22.289,-4.584 19.507,-7.366 18.745,-8.128 16.467,-8.128 14.884,-8.128 14.707,-8.306 14.63,-8.382 13.329,-8.382 -4.371,-8.382 -4.574,-8.179 -4.733,-8.02 -4.733,-6.592 -4.733,-3.006 -4.547,-2.819 -3.353,-2.819 -3.099,-2.565 -2.515,-1.981 -1.956,-1.981 2.692,-1.981 2.87,-2.159 2.819,-2.21 2.819,-2.501
TX_GND on Top Layer "Top Layer-No Net" (solid, remove dead copper, pour order 10): -5.425,-0.859 -4.648,-0.965 -4.572,-1.041 -4.572,-2.057 -4.572,-7.874 -4.724,-8.026 -7.62,-8.026 -7.849,-8.255 -18.339,-8.255 -18.491,-8.103 -18.491,-0.991 -18.39,-0.889 -5.455,-0.889 -5.425,-0.859
GND on Bottom Layer "Top Layer-No Net" (solid, remove dead copper, pour order 17): 5.131,46.431 5.131,47.278 5.156,47.303 7.823,47.303 8.103,45.314 8.975,36.601 9.677,29.439 10.058,27.813 10.871,26.162 12.421,24.486 15.392,22.86 18.136,20.726 19.482,19.329 19.152,18.593 19.152,17.628 19.583,16.916 20.625,16.383 21.971,16.408 23.546,14.148 25.095,11.278 25.984,9.093 25.908,-9.246 24.359,-12.792 20.243,-18.669 19.533,-19.329 18.567,-18.364 16.993,-18.263 15.977,-18.93 15.471,-20.066 15.621,-21.158 16.332,-22.022 13.843,-23.774 10.668,-25.375 10.568,-23.063 4.801,-23.012 4.775,-25.756 -6.223,-25.756 -6.145,-22.885 -10.262,-22.809 -10.466,-23.241 -10.439,-25.425 -14.63,-23.317 -16.358,-22.098 -15.501,-21.184 -15.501,-19.914 -15.85,-18.948 -17.018,-18.313 -18.39,-18.39 -19.482,-19.253 -23.52,-14.376 -26.035,-8.839 -25.908,9.042 -24.028,13.411 -21.946,16.504 -20.498,16.332 -19.482,16.967 -19.126,18.059 -19.279,19.296 -19.304,19.558 -12.116,24.689 -10.185,27.127 -9.677,29.108 -7.797,47.346 -4.061,47.291 -4.064,42.647 3.886,42.748 3.937,47.303 5.131,47.371
TX_VCC on Bottom Layer "Top Layer-No Net" (solid, remove dead copper, pour order 16): 4.826,39.599 4.547,39.878 4.547,40.361 4.547,40.538 4.877,40.869 4.902,40.843 8.56,40.843 8.992,37.16 9.711,29.566 10.084,27.737 10.846,26.187 12.167,24.562 13.767,23.774 16.053,22.352 18.339,20.574 19.431,19.456 19.075,18.136 19.863,16.662 20.701,16.256 22.098,16.377 24.46,12.7 26.035,9.042 26.035,-8.941 26.035,-1.753 25.578,-2.21 25.273,-2.21 18.466,-2.21 18.11,-1.854 18.136,-1.829 18.136,-1.803 18.136,0.305 18.694,0.864 18.771,0.864 22.987,0.864 23.139,1.016 22.809,3.937 22.276,6.35 20.828,10.109 18.644,13.792 16.993,16.002 15.9,17.018 12.776,19.583 10.439,20.828 9.093,21.59 8.661,22.098 6.833,24.365 5.893,26.619 5.486,28.194 5.131,28.829 5.08,34.163 5.023,34.22 5.023,38.43 4.775,38.43 4.521,38.684 4.521,39.649

## Keep-outs
Keep-Out Layer:
  circle w0.254: c-22.074,-12.147 r0.8
  circle w0.3: c22.076,-12.147 r0.8
  lines w0.1: -5.105,-21.373 -5.105,-13.995 ; -5.063,-13.988 3.937,-13.988 3.937,-21.488 -4.941,-21.488
  lines w0.2: -4.074,42.671 -4.074,47.278 -4.049,47.303 ; 3.926,42.671 3.926,47.303
  lines w0.3: -26.055,-8.781 ccw(c0.004,0.003) -19.458,-19.425 ; -26.001,-8.97 -25.983,8.937 ; -25.988,8.985 cw(c0.004,0.003) -22.006,16.49 ; -21.99,16.478 ccw(c-21.103,18.271) -19.476,19.433 ; -20.163,-17.685 cw(c-20.092,-17.089) -20.092,-17.689 ; -19.451,-19.417 cw(c-17.552,-20.315) -16.401,-22.071 ; -19.411,19.479 cw(c0.004,0.003) -12.231,24.632 ; -16.376,-22.097 ccw(c0.024,-0.022) -10.466,-25.443 -10.466,-23.03 -10.275,-22.839 -6.145,-22.839 -6.145,-25.811 4.827,-25.811 4.827,-22.991 4.833,-22.997 10.501,-22.997 10.596,-23.091 10.596,-25.375 ccw(c0.004,0.003) 16.404,-22.071 cw(c17.555,-20.315) 19.454,-19.417 ; -12.241,24.653 ccw(c-16.461,29.962) -9.721,29.213 ; -9.735,29.258 -7.846,47.303 -4.049,47.303 ; -4.074,42.671 3.926,42.671 ; -1.635,36.394 ccw(c-0.035,36.369) 1.564,36.394 ; -1.612,36.417 -1.612,37.487 cw(c-0.013,37.512) 1.587,37.486 ; 1.601,36.431 1.601,37.503 ; 3.917,47.303 7.854,47.303 9.719,29.489 ; 9.724,29.442 ccw(c17.015,30.253) 12.45,24.51 ; 12.456,24.523 cw(c0.004,0.003) 19.459,19.439 ; 19.469,19.433 ccw(c21.132,18.322) 22.018,16.529 ; 19.554,-19.337 ccw(c0.004,0.003) 25.985,-9.012 ; 21.997,16.513 cw(c0.004,0.003) 25.987,9.011 ; 24.488,-9.889 cw(c24.501,-9.289) 24.501,-9.889 ; 26.001,-9.012 26.001,8.909

## Other copper
Top Layer:
  region net VSW: 10.414,-17.043 4.267,-17.043 4.267,-21.412 10.414,-21.412
  region net TX_VCC: 2.54,42.445 1.194,42.445 1.194,41.554 2.54,41.554
  region net GND: -1.402,42.145 -5.258,42.145 -5.258,39.243 -1.402,39.243
  region net TX_VCC: 6.725,-3.171 3.025,-3.171 3.025,-7.271 6.725,-7.271
  region net TX_VCC: 9.525,-3.571 8.125,-3.571 8.125,-7.071 9.525,-7.071
  region net TX_VCC: 3.425,-3.271 1.225,-3.271 1.225,-6.871 3.425,-6.871
  region net TX_VCC: 0.025,-3.571 -1.475,-3.571 -1.475,-7.071 0.025,-7.071
  region net TX_VCC: 1.925,-3.371 -2.975,-3.371 -2.975,-4.343 1.925,-4.343
  region net 5V: 18.079,11.964 16.453,11.964 16.453,7.595 18.079,7.595
  region net GND: 3.15,1.422 -4.293,1.422 -4.293,-1.77 3.15,-1.77
  region net TX_VCC: 4.42,40.411 1.97,40.411 1.97,36.627 4.42,36.627
Bottom Layer:
  region net TX_VCC: 7.742,40.767 5.055,40.767 5.055,27.178 7.742,27.178
  region net TX_VCC: 24.003,7.366 22.098,7.366 22.098,-0.457 24.003,-0.457

## Silkscreen, mask and mechanical layers (free items; w line width, h text height)
Top Overlay:
  text "BP-K9107W5AA0" at 9.957,1.245 h1.27
  text "2018-03-03" at 10.374,-1.778 h1.27
Bottom Overlay:
  circle w0.5: c0,0 r25
  text "10W" at 6.35,5.029 h1.52
  text "For" at 6.35,1.676 h1.52
  text "Iphone X" at 6.579,-1.956 h1.52
  text "SANSUNG" at 6.807,-5.309 h1.52
Top Solder:
  text "+" at 5.385,34.671 h3
  text "-" at -6.807,34.569 h3